# Altium PCB circuit_everything.PcbDoc (part 2 of 3)
Units mm, origin at the board's own origin, x right, y up, seen from the top; angles counter-clockwise.
Board outline 169.67 x 159.89 mm, 2 copper layers (Top Layer, Bottom Layer); 242 components, 162 nets, 656 pads, 43 vias.
Unrouted connection lines stored in the file: 9.
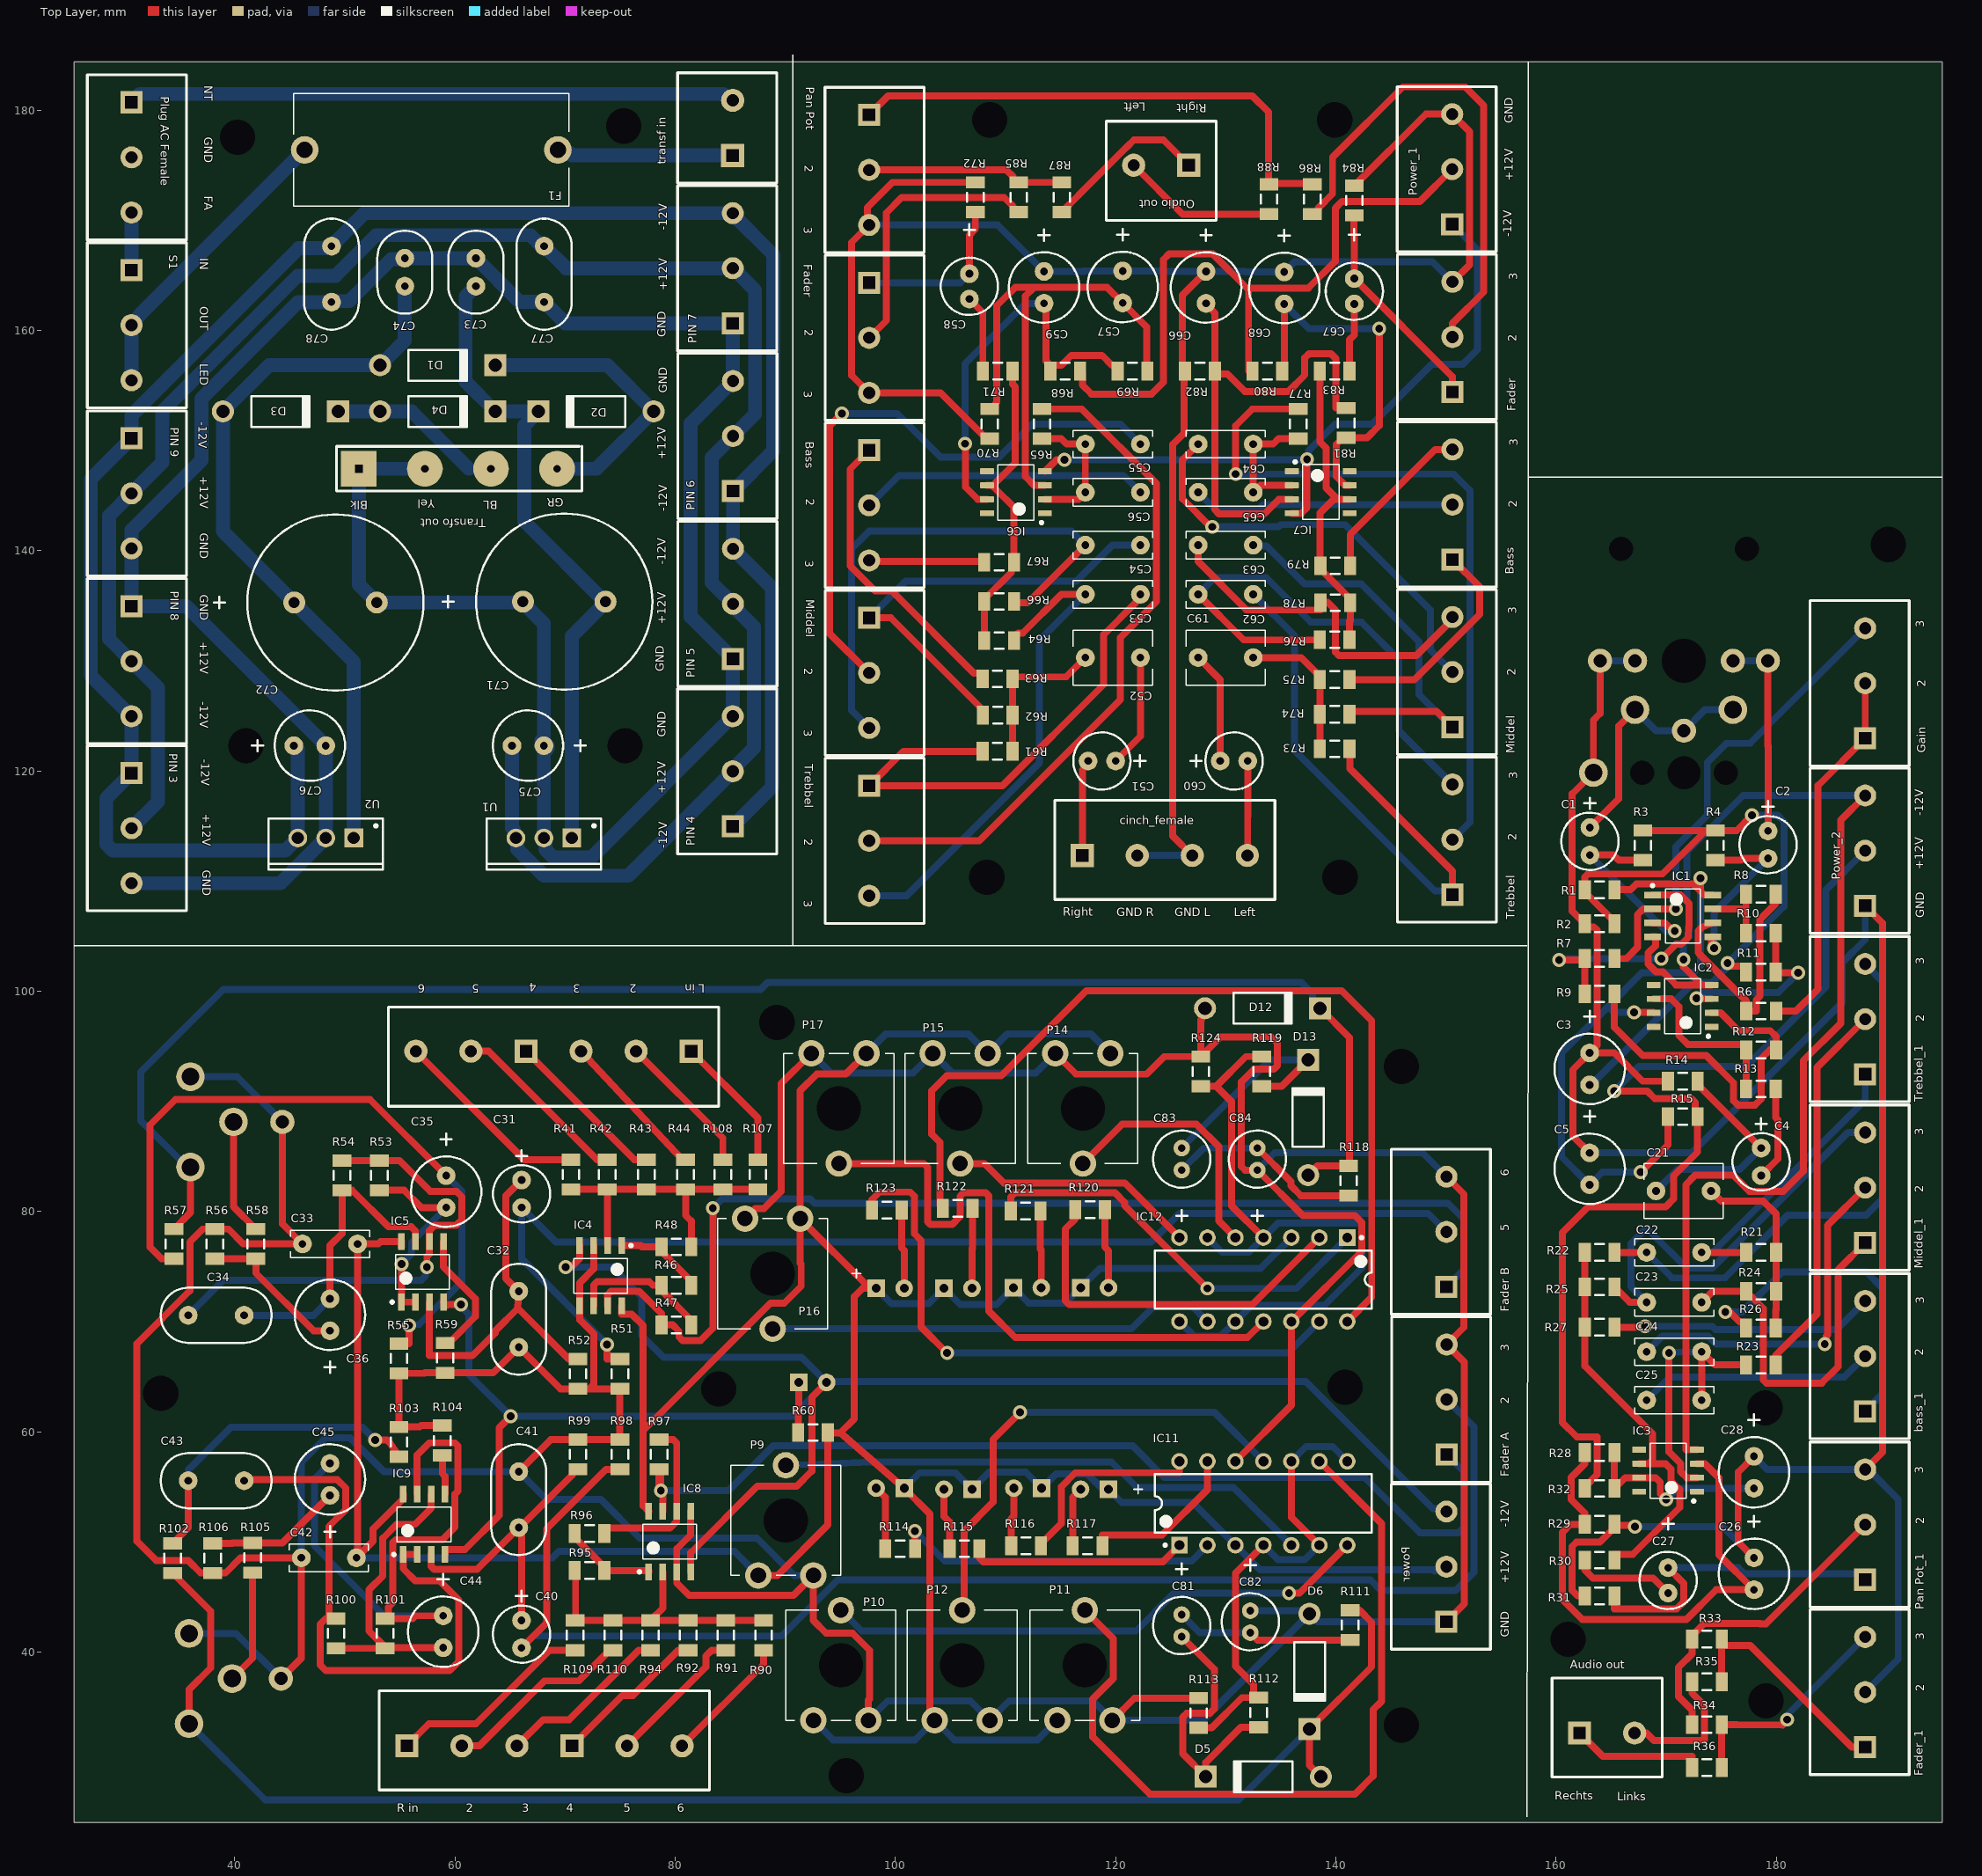
[diagram p0: Top Layer view]

## Via types
v1: diameter 1.27, hole 0.711, Top Layer to Bottom Layer, 43 vias

## Nets (pads, with @x,y where several pads share a name; then routed paths per layer and width w, separated by ;. In a path a pad name is that pad's centre, name@x,y a point inside that pad or via, vN(x,y) a via of type N, cw(c..) or ccw(c..) an arc to the next point about the centre after c; other vN are vias at no path point) (continued)
NetC51_1: (continued)
  Top Layer w0.635: cinch_female.1@116.99,112.331 116.99,120.114 117.498,120.621 C51.1@117.498,120.909
NetC51_2: C51.2 C52.1 | length 10.3
  Top Layer w0.635: C51.2@119.998,120.909 122.248,123.159 C52.1@122.248,130.299